# EAGLE board CT_schematic (EAGLE 7.6.0)

Size 100 x 80 mm. Coordinates in mm from the lower left corner, seen from the top.
Outline: 0,0 100,0 100,80 0,80 0,0
Copper layers (1*16): Top 0.035mm / dielectric 1.5mm / Bottom 0.035mm
Design rules "default": minimum track width 10mil, minimum drill 24mil, track to track 8mil, track to pad 8mil, pad to pad 8mil, via to via 8mil, smd to smd 8mil, copper to edge 40mil, drill to drill 8mil, minimum pad ring 10mil, minimum via ring 8mil, stop-mask expansion 4mil, vias tented up to drill 0mil, thermal gap 10mil

## Footprints (pad centres in the part's own frame; a part is rotated, then mirrored left to right if it is on the bottom)
C0603 = smd 0.8 x 0.8: 1 -0.762,0; 2 0.762,0
C0402 = smd 0.5 x 0.5: 1 -0.508,0; 2 0.508,0
C0805 = smd 1.2 x 1.3: 1 -1.016,0; 2 1.016,0
EXV-9B = smd 2.718 x 1.778: 1 -2.108,0; 2 2.108,0
EXV-9H = smd 3.505 x 1.676: 1 -2.857,0; 2 2.857,0
L0603 = smd 0.8 x 0.8: 1 -0.762,0; 2 0.762,0
DR1040 = smd 1.6 x 3.2: 1 -4.458,0; 2 4.458,0
PJ-037B_PACKAGE = drill 3.7 square: 1 12,0 | drill 3.2 square: 2 6,0
R0603 = smd 0.8 x 0.8: 1 -0.762,0; 2 0.762,0
LQFP100 = smd 0.3 x 1.2: 1 -6,-7.75; 2 -5.5,-7.75; 3 -5,-7.75; 4 -4.5,-7.75; 5 -4,-7.75; 6 -3.5,-7.75; 7 -3,-7.75; 8 -2.5,-7.75; 9 -2,-7.75; 10 -1.5,-7.75; 11 -1,-7.75; 12 -0.5,-7.75; 13 0,-7.75; 14 0.5,-7.75; 15 1,-7.75; 16 1.5,-7.75; 17 2,-7.75; 18 2.5,-7.75; 19 3,-7.75; 20 3.5,-7.75; 21 4,-7.75; 22 4.5,-7.75; 23 5,-7.75; 24 5.5,-7.75; 25 6,-7.75; 51 6,7.75; 52 5.5,7.75; 53 5,7.75; 54 4.5,7.75; 55 4,7.75; 56 3.5,7.75; 57 3,7.75; 58 2.5,7.75; 59 2,7.75; 60 1.5,7.75; 61 1,7.75; 62 0.5,7.75; 63 0,7.75; 64 -0.5,7.75; 65 -1,7.75; 66 -1.5,7.75; 67 -2,7.75; 68 -2.5,7.75; 69 -3,7.75; 70 -3.5,7.75; 71 -4,7.75; 72 -4.5,7.75; 73 -5,7.75; 74 -5.5,7.75; 75 -6,7.75 | smd 1.2 x 0.3: 26 7.75,-6; 27 7.75,-5.5; 28 7.75,-5; 29 7.75,-4.5; 30 7.75,-4; 31 7.75,-3.5; 32 7.75,-3; 33 7.75,-2.5; 34 7.75,-2; 35 7.75,-1.5; 36 7.75,-1; 37 7.75,-0.5; 38 7.75,0; 39 7.75,0.5; 40 7.75,1; 41 7.75,1.5; 42 7.75,2; 43 7.75,2.5; 44 7.75,3; 45 7.75,3.5; 46 7.75,4; 47 7.75,4.5; 48 7.75,5; 49 7.75,5.5; 50 7.75,6; 76 -7.75,6; 77 -7.75,5.5; 78 -7.75,5; 79 -7.75,4.5; 80 -7.75,4; 81 -7.75,3.5; 82 -7.75,3; 83 -7.75,2.5; 84 -7.75,2; 85 -7.75,1.5; 86 -7.75,1; 87 -7.75,0.5; 88 -7.75,0; 89 -7.75,-0.5; 90 -7.75,-1; 91 -7.75,-1.5; 92 -7.75,-2; 93 -7.75,-2.5; 94 -7.75,-3; 95 -7.75,-3.5; 96 -7.75,-4; 97 -7.75,-4.5; 98 -7.75,-5; 99 -7.75,-5.5; 100 -7.75,-6
TQFP64_10X10MC = smd 1.473 x 0.279: 1 -5.613,3.75; 2 -5.613,3.25; 3 -5.613,2.75; 4 -5.613,2.25; 5 -5.613,1.75; 6 -5.613,1.25; 7 -5.613,0.75; 8 -5.613,0.25; 9 -5.613,-0.25; 10 -5.613,-0.75; 11 -5.613,-1.25; 12 -5.613,-1.75; 13 -5.613,-2.25; 14 -5.613,-2.75; 15 -5.613,-3.25; 16 -5.613,-3.75; 33 5.613,-3.75; 34 5.613,-3.25; 35 5.613,-2.75; 36 5.613,-2.25; 37 5.613,-1.75; 38 5.613,-1.25; 39 5.613,-0.75; 40 5.613,-0.25; 41 5.613,0.25; 42 5.613,0.75; 43 5.613,1.25; 44 5.613,1.75; 45 5.613,2.25; 46 5.613,2.75; 47 5.613,3.25; 48 5.613,3.75 | smd 0.279 x 1.473: 17 -3.75,-5.613; 18 -3.25,-5.613; 19 -2.75,-5.613; 20 -2.25,-5.613; 21 -1.75,-5.613; 22 -1.25,-5.613; 23 -0.75,-5.613; 24 -0.25,-5.613; 25 0.25,-5.613; 26 0.75,-5.613; 27 1.25,-5.613; 28 1.75,-5.613; 29 2.25,-5.613; 30 2.75,-5.613; 31 3.25,-5.613; 32 3.75,-5.613; 49 3.75,5.613; 50 3.25,5.613; 51 2.75,5.613; 52 2.25,5.613; 53 1.75,5.613; 54 1.25,5.613; 55 0.75,5.613; 56 0.25,5.613; 57 -0.25,5.613; 58 -0.75,5.613; 59 -1.25,5.613; 60 -1.75,5.613; 61 -2.25,5.613; 62 -2.75,5.613; 63 -3.25,5.613; 64 -3.75,5.613
7498011122R = smd 0.71 x 2.29: 1 -3.545,-3.18; 2 -2.525,-3.18; 3 -1.505,-3.18; 4 -0.485,-3.18; 5 0.535,-3.18; 6 1.555,-3.18; 8 3.595,-3.18; 9 5.635,-3.18; 10 6.655,-3.18; 11 -6.605,-3.18; 12 -5.585,-3.18 | smd 1.4 x 2.54: 13 -8.51,10.2; 14 8.51,10.2 | hole 1.4: -3.5,0; 3.5,0
AT24C02D = smd 1.6 x 0.6: 1 -2.475,1.905 | smd 1.55 x 0.6: 2 -2.475,0.635; 3 -2.475,-0.635; 4 -2.475,-1.905; 5 2.475,-1.905; 6 2.475,-0.635; 7 2.475,0.635; 8 2.475,1.905
VFBGA-63 = smd 0.4 x 0.4: A1 -3.6,4.4; A2 -2.8,4.4; A9 2.8,4.4; A10 3.6,4.4; B1 -3.6,3.6; B9 2.8,3.6; B10 3.6,3.6; C3 -2,2.8; C4 -1.2,2.8; C5 -0.4,2.8; C6 0.4,2.8; C7 1.2,2.8; C8 2,2.8; D3 -2,2; D4 -1.2,2; D5 -0.4,2; D6 0.4,2; D7 1.2,2; D8 2,2; E3 -2,1.2; E4 -1.2,1.2; E5 -0.4,1.2; E6 0.4,1.2; E7 1.2,1.2; E8 2,1.2; F3 -2,0.4; F4 -1.2,0.4; F5 -0.4,0.4; F6 0.4,0.4; F7 1.2,0.4; F8 2,0.4; G3 -2,-0.4; G4 -1.2,-0.4; G5 -0.4,-0.4; G6 0.4,-0.4; G7 1.2,-0.4; G8 2,-0.4; H3 -2,-1.2; H4 -1.2,-1.2; H5 -0.4,-1.2; H6 0.4,-1.2; H7 1.2,-1.2; H8 2,-1.2; J3 -2,-2; J4 -1.2,-2; J5 -0.4,-2; J6 0.4,-2; J7 1.2,-2; J8 2,-2; K3 -2,-2.8; K4 -1.2,-2.8; K5 -0.4,-2.8; K6 0.4,-2.8; K7 1.2,-2.8; K8 2,-2.8; L1 -3.6,-3.6; L2 -2.8,-3.6; L9 2.8,-3.6; L10 3.6,-3.6; M1 -3.6,-4.4; M2 -2.8,-4.4; M9 2.8,-4.4; M10 3.6,-4.4
ABS07-32.768KHZ-7-T = smd 1.1 x 2.4: 1 -2.5,0; 2 0,0
ABLS-25.000MHZ-B2F-T = smd 5.6 x 2.8: 1 -3.81,0; 2 5.69,0
LP2954 = smd 1.6 x 0.6: 1 -2.475,1.905 | smd 1.55 x 0.6: 2 -2.475,0.635; 3 -2.475,-0.635; 4 -2.475,-1.905; 5 2.475,-1.905; 6 2.475,-0.635; 7 2.475,0.635; 8 2.475,1.905
TSOT-23-5 = smd 1.3 x 0.62: 1 -1.31,0.95; 2 -1.31,0; 3 -1.31,-0.95; 4 1.31,-0.95; 5 1.31,0.95
SON-6 = smd 0.55 x 0.3: 1 -0.355,0.5 | smd 0.52 x 0.3: 2 -0.37,0; 3 -0.37,-0.5; 4 0.37,-0.5; 5 0.37,0; 6 0.37,0.5
SW_4-1437565-2 = smd 1.4 x 2.1: 1 -2.23,4.55; 2 -2.23,-4.55; 3 2.23,4.55; 4 2.23,-4.55
LGM67K-G1J2-24-Z = smd 0.8 x 1.4: A -2,0; C 0,0
NC7SZ125M5X = smd 1.3 x 0.7: 1 -1.3,0.95; 2 -1.3,0; 3 -1.3,-0.95; 4 1.3,-0.95; 5 1.3,0.95
DUMMY_PACKAGE_218 = drill 0.3: 1 0,-1; 2 1.5,-1; 3 3,-1

## Placement (x,y rotation side)
C1  1e-06  [C0603]  -62.23,80.01 0 top  (outside the outline)
C2  1e-07  [C0603]  -66.04,80.01 0 top  (outside the outline)
C3  1e-07  [C0603]  -69.85,80.01 0 top  (outside the outline)
C4  1e-07  [C0603]  -73.66,80.01 0 top  (outside the outline)
C5  1e-07  [C0603]  -77.47,80.01 0 top  (outside the outline)
C6  1e-07  [C0603]  -15.24,85.09 0 top  (outside the outline)
C7  1e-07  [C0603]  -19.05,85.09 0 top  (outside the outline)
C8  4.7e-06  [C0603]  -39.37,80.01 0 top  (outside the outline)
C9  2.2e-06  [C0603]  -43.18,80.01 0 top  (outside the outline)
C10  2.2e-06  [C0603]  -46.99,80.01 0 top  (outside the outline)
C11  1e-07  [C0603]  -22.86,85.09 0 top  (outside the outline)
C12  1e-07  [C0603]  -26.67,85.09 0 top  (outside the outline)
C13  1e-08  [C0603]  -30.48,85.09 0 top  (outside the outline)
C14  1e-06  [C0603]  -34.29,85.09 0 top  (outside the outline)
C15  1e-11  [C0402]  -27.94,90.17 0 top  (outside the outline)
C16  1e-11  [C0402]  -31.75,90.17 0 top  (outside the outline)
C17  1e-11  [C0402]  -35.56,90.17 0 top  (outside the outline)
C18  1e-11  [C0402]  -39.37,90.17 0 top  (outside the outline)
C19  1.8e-08  [C0402]  -24.13,90.17 0 top  (outside the outline)
C20  2.2e-06  [C0603]  -50.8,80.01 0 top  (outside the outline)
C21  1e-07  [C0402]  -43.18,90.17 0 top  (outside the outline)
C22  1e-08  [C0402]  -46.99,90.17 0 top  (outside the outline)
C23  2.2e-06  [C0603]  -54.61,80.01 0 top  (outside the outline)
C24  1e-07  [C0402]  -50.8,90.17 0 top  (outside the outline)
C25  1e-08  [C0402]  -54.61,90.17 0 top  (outside the outline)
C26  1e-07  [C0402]  -58.42,90.17 0 top  (outside the outline)
C27  1e-07  [C0402]  -62.23,90.17 0 top  (outside the outline)
C28  1e-05  [C0805]  -59.69,62.23 0 top  (outside the outline)
C29  1e-07  [C0402]  -66.04,90.17 0 top  (outside the outline)
C30  1e-07  [C0402]  -69.85,90.17 0 top  (outside the outline)
C31  1e-08  [C0402]  -73.66,90.17 0 top  (outside the outline)
C32  1e-07  [C0402]  -77.47,90.17 0 top  (outside the outline)
C33  1e-07  [C0402]  -15.24,95.25 0 top  (outside the outline)
C34  1e-07  [C0402]  -19.05,95.25 0 top  (outside the outline)
C35  1e-07  [C0402]  -22.86,95.25 0 top  (outside the outline)
C36  2.2e-06  [C0603]  -58.42,80.01 0 top  (outside the outline)
C37  1e-06  [EXV-9B]  -30.48,62.23 0 top  (outside the outline)
C38  2.2e-06  [EXV-9B]  -39.37,62.23 0 top  (outside the outline)
C39  1e-05  [C0805]  -64.77,62.23 0 top  (outside the outline)
C40  1e-05  [C0805]  -69.85,62.23 0 top  (outside the outline)
C41  1e-07  [C0402]  -26.67,95.25 0 top  (outside the outline)
C42  0.0001  [EXV-9H]  -52.07,46.99 0 top  (outside the outline)
C43  0.0001  [EXV-9H]  -63.5,46.99 0 top  (outside the outline)
C44  1e-08  [C0402]  -30.48,95.25 0 top  (outside the outline)
C45  1e-08  [C0402]  -34.29,95.25 0 top  (outside the outline)
F1  240.0  [L0603]  -38.1,85.09 0 top  (outside the outline)
F2  510.0  [L0603]  -41.91,85.09 0 top  (outside the outline)
I1  5.2e-06  [DR1040]  -64.77,34.29 0 top  (outside the outline)
J1  PJ-037B  [PJ-037B_PACKAGE]  -27.94,35.56 0 top  (outside the outline)
R2  1000.0  [R0603]  -45.72,85.09 0 top  (outside the outline)
R4  4700.0  [R0603]  -49.53,85.09 0 top  (outside the outline)
R5  4700.0  [R0603]  -53.34,85.09 0 top  (outside the outline)
R6  2200.0  [R0603]  -57.15,85.09 0 top  (outside the outline)
R7  2200.0  [R0603]  -60.96,85.09 0 top  (outside the outline)
R8  2200.0  [R0603]  -64.77,85.09 0 top  (outside the outline)
R9  2200.0  [R0603]  -68.58,85.09 0 top  (outside the outline)
R10  10000.0  [R0603]  -52.07,69.85 0 top  (outside the outline)
R11  0.1  [R0603]  -72.39,85.09 0 top  (outside the outline)
R12  0.1  [R0603]  -76.2,85.09 0 top  (outside the outline)
R13  200.0  [R0603]  -80.01,85.09 0 top  (outside the outline)
R14  200.0  [R0603]  -15.24,90.17 0 top  (outside the outline)
R15  10000.0  [R0603]  -57.15,69.85 0 top  (outside the outline)
R16  10000.0  [R0603]  -62.23,69.85 0 top  (outside the outline)
R17  10000.0  [R0603]  -67.31,69.85 0 top  (outside the outline)
R18  1270.0  [R0603]  -19.05,90.17 0 top  (outside the outline)
R19  10000.0  [R0603]  -72.39,69.85 0 top  (outside the outline)
R20  10000.0  [R0603]  -77.47,69.85 0 top  (outside the outline)
R21  10000.0  [R0603]  -15.24,74.93 0 top  (outside the outline)
R22  10000.0  [R0603]  -20.32,74.93 0 top  (outside the outline)
R23  10000.0  [R0603]  -25.4,74.93 0 top  (outside the outline)
R24  10000.0  [R0603]  -30.48,74.93 0 top  (outside the outline)
R25  10000.0  [R0603]  -35.56,74.93 0 top  (outside the outline)
R26  10000.0  [R0603]  -40.64,74.93 0 top  (outside the outline)
R27  10000.0  [R0603]  -45.72,74.93 0 top  (outside the outline)
R28  10000.0  [R0603]  -50.8,74.93 0 top  (outside the outline)
R29  10000.0  [R0603]  -55.88,74.93 0 top  (outside the outline)
R30  10000.0  [R0603]  -60.96,74.93 0 top  (outside the outline)
R31  10000.0  [R0603]  -66.04,74.93 0 top  (outside the outline)
R32  10000.0  [R0603]  -71.12,74.93 0 top  (outside the outline)
R33  10000.0  [R0603]  -76.2,74.93 0 top  (outside the outline)
R34  10000.0  [R0603]  -15.24,80.01 0 top  (outside the outline)
R35  100000.0  [R0603]  -21.59,69.85 0 top  (outside the outline)
R36  100000.0  [R0603]  -26.67,69.85 0 top  (outside the outline)
R37  47000.0  [R0603]  -20.32,80.01 0 top  (outside the outline)
R38  100000.0  [R0603]  -31.75,69.85 0 top  (outside the outline)
R39  220000.0  [R0603]  -36.83,69.85 0 top  (outside the outline)
R40  1000000.0  [R0603]  -16.51,69.85 0 top  (outside the outline)
R41  10000.0  [R0603]  -25.4,80.01 0 top  (outside the outline)
R42  10000.0  [R0603]  -30.48,80.01 0 top  (outside the outline)
R43  82000.0  [R0603]  -35.56,80.01 0 top  (outside the outline)
R44  300000.0  [R0603]  -41.91,69.85 0 top  (outside the outline)
R45  120000.0  [R0603]  -46.99,69.85 0 top  (outside the outline)
U1  STM32F407VET6  [LQFP100]  -43.18,8.89 0 top  (outside the outline)
U2  BCM5221KPT  [TQFP64_10X10MC]  -59.69,7.62 0 top  (outside the outline)
U3  7498011122R  [7498011122R]  -22.86,7.62 0 top  (outside the outline)
U4  AT24C02D-SSHM-T  [AT24C02D]  -25.4,46.99 0 top  (outside the outline)
U5  mt29f4g08abbdah4  [VFBGA-63]  -34.29,34.29 0 top  (outside the outline)
U6  ABS07-32.768KHZ-7-T  [ABS07-32.768KHZ-7-T]  -69.85,55.88 0 top  (outside the outline)
U7  ABLS-25.000MHZ-B2F-T  [ABLS-25.000MHZ-B2F-T]  -26.67,55.88 0 top  (outside the outline)
U8  ABLS-25.000MHZ-B2F-T  [ABLS-25.000MHZ-B2F-T]  -46.99,55.88 0 top  (outside the outline)
U9  LP2954AIMX/NOPB  [LP2954]  -41.91,46.99 0 top  (outside the outline)
U10  ltc3406es5  [TSOT-23-5]  -74.93,62.23 0 top  (outside the outline)
U11  TPS3895ADRYR  [SON-6]  -43.18,93.98 0 top  (outside the outline)
U12  4-1437565-2  [SW_4-1437565-2]  -54.61,34.29 0 top  (outside the outline)
U13  Q65110A2395  [LGM67K-G1J2-24-Z]  -17.78,63.5 0 top  (outside the outline)
U14  nc7sz125m5x  [NC7SZ125M5X]  -46.99,62.23 0 top  (outside the outline)
U15  nc7sz125m5x  [NC7SZ125M5X]  -53.34,62.23 0 top  (outside the outline)
U16  Dummy  [DUMMY_PACKAGE_218]  -40.64,95.25 0 top  (outside the outline)

## Library data of the parts
C1-C45 F1 F2 I1 J1 R2 R4-R45 U1-U16 = circuit_tree

## Nets
CLK_CRYSTAL_U1_8: C15.1 U1.8 U6.1
CLK_CRYSTAL_U1_9: C16.1 U1.9 U6.2
CLK_CRYSTAL_U1_12: C17.1 U1.12 U7.1
CLK_CRYSTAL_U1_13: C18.1 U1.13 U7.2
CLK_CRYSTAL_U2_5: U2.5 U8.2
CLK_CRYSTAL_U2_6: U2.6 U8.1
GND: C1.2 C2.2 C3.2 C4.2 C5.2 C6.2 C7.2 C8.2 C9.2 C10.2 C11.2 C12.2 C13.2 C14.2 C15.2 C16.2 C17.2 C18.2 C19.2 C20.2 C21.2 C22.2 C23.2 C24.2 C25.2 C26.2 C27.2 C28.2 C29.2 C30.2 C31.2 C32.2 C33.2 C34.2 C35.2 C36.2 C37.2 C38.2 C39.2 C40.1 C40.2 C41.2 C42.2 C43.2 C44.2 C45.2 J1.2 R2.2 R10.2 R11.2 R12.2 R15.2 R17.2 R18.2 R21.2 R22.2 R23.2 R24.2 R26.2 R28.2 R29.2 R38.2 R39.2 R43.2 R45.2 U1.10 U1.20 U1.27 U1.74 U1.99 U2.7 U2.24 U2.29 U2.32 U2.40 U2.45 U2.54 U2.63 U3.10 U3.12 U4.4 U5.C5 U5.F7 U5.K3 U5.K8 U9.4 U10.2 U11.2 U13.C U14.1 U14.3 U15.1 U15.3 U16.1
NET_U1_14: R5.1 U1.14 U15.4
NET_U1_16: R8.1
NET_U1_22: C11.1 C12.1 C13.1 C14.1 F1.1 U1.21 U1.22
NET_U1_25: R9.1
NET_U1_49: C9.1 U1.49
NET_U1_73: C10.1 U1.73
NET_U1_92: R6.1 U1.92 U4.6
NET_U1_93: R7.1 U1.93 U4.5
NET_U1_94: R10.1 U1.94
NET_U1_97: U13.A
NET_U1_98: U12.3 U12.4
NET_U2_2: C23.1 C24.1 C25.1 U2.2 U2.55
NET_U2_9: R4.1 U2.9 U14.4
NET_U2_10: R19.1 U2.10
NET_U2_11: R20.1 U2.11
NET_U2_12: R21.1 U2.12
NET_U2_13: R22.1 U2.13
NET_U2_14: R23.1 U2.14
NET_U2_16: R17.1 U2.16
NET_U2_18: R25.1 U2.18
NET_U2_20: U2.20
NET_U2_23: R18.1 U2.23
NET_U2_27: C20.1 C21.1 C22.1 U2.22 U2.27 U2.28
NET_U2_37: R24.1 U2.37
NET_U2_38: R15.1 U2.38
NET_U2_39: R16.1 U2.39
NET_U3_1: U2.31 U3.1
NET_U3_2: F2.2 U3.2
NET_U3_3: U2.30 U3.3
NET_U3_4: U2.26 U3.4
NET_U3_5: C19.1 F2.1 U3.2 U3.5
NET_U3_6: U2.25 U3.6
NET_U3_8: R12.1 U3.8
NET_U3_9: R13.1 U3.9
NET_U3_11: R14.1 U3.11
NET_U3_12: R13.2 U3.12
NET_U3_13: R11.1 U3.13 U3.14
NET_U3_35: R14.2
NET_U4_1: R27.1 U4.1
NET_U4_2: R28.1 U4.2
NET_U4_3: R29.1 U4.3
NET_U4_7: R26.1 U4.7
NET_U5_C3: R34.1 U5.C3
NET_U9_3: R36.1 U9.3
NET_U9_5: R35.1 U9.5
NET_U9_7: R37.2 R38.1 U9.7
NET_U10_1: U10.1
NET_U10_3: I1.1 U10.3
NET_U10_5: R39.1 R40.1 U10.5
NET_U10_ATNET_3: I1.2 R40.2
NET_U11_1: R42.1 R43.1 U11.1
NET_U11_3: R44.2 R45.1 U11.3
NET_U11_4: R41.1 U11.4 U14.2 U15.2
NET_U12_1: R2.1 U12.1 U12.2
PROC_FSMC_D0: U1.61 U5.H4
PROC_FSMC_D1: U1.62 U5.J4
PROC_FSMC_D2: U1.81 U5.K4
PROC_FSMC_D3: U1.82 U5.K5
PROC_FSMC_D4: U1.38 U5.K6
PROC_FSMC_D5: U1.39 U5.J7
PROC_FSMC_D6: U1.40 U5.K7
PROC_FSMC_D7: U1.41 U5.J8
PROC_FSMC_NCE2: R31.1 U1.88 U5.C6
PROC_FSMC_NOE: R33.1 U1.85 U5.D4
PROC_FSMC_NWAIT: R30.1 U1.87 U5.C8
PROC_FSMC_NWE: R32.1 U1.86 U5.C7
PROC_TIM1_CH2: U1.42 U16.2
PROC_TIM1_CH4: U1.45 U16.3
VCC_S1_5V2: C37.1 C39.1 C42.1 C43.1 J1.1 R36.2 U9.8 U10.4
VCC_TIER1_1V8: C1.1 C2.1 C3.1 C4.1 C5.1 C6.1 C7.1 C8.1 C31.1 C32.1 C33.1 C34.1 C35.1 C36.1 C38.1 C41.1 C44.1 C45.1 F1.2 R5.2 R6.2 R7.2 R8.2 R9.2 R27.2 R30.2 R31.2 R32.2 R33.2 R34.2 R35.2 R37.1 R41.2 R42.2 R44.1 U1.6 U1.11 U1.19 U1.28 U1.50 U1.75 U1.100 U4.8 U5.D3 U5.G4 U5.H8 U5.J6 U9.1 U11.6 U14.5 U15.5
VCC_TIER1_3V3: C26.1 C27.1 C28.1 C29.1 C30.1 C40.2 I1.2 R4.2 R16.2 R19.2 R20.2 R25.2 R40.2 U2.1 U2.3 U2.46

## Tracks (layer width: path | path; a pad name or v marks a point on that pad's centre or on a via)
CLK_CRYSTAL_U1_8  (2 unrouted)
CLK_CRYSTAL_U1_9  (2 unrouted)
CLK_CRYSTAL_U1_12  (2 unrouted)
CLK_CRYSTAL_U1_13  (2 unrouted)
CLK_CRYSTAL_U2_5  (1 unrouted)
CLK_CRYSTAL_U2_6  (1 unrouted)
GND  (93 unrouted)
NET_U1_14  (2 unrouted)
NET_U1_22  (6 unrouted)
NET_U1_49  (1 unrouted)
NET_U1_73  (1 unrouted)
NET_U1_92  (2 unrouted)
NET_U1_93  (2 unrouted)
NET_U1_94  (1 unrouted)
NET_U1_98  (1 unrouted)
NET_U2_2  (4 unrouted)
NET_U2_9  (2 unrouted)
NET_U2_10  (1 unrouted)
NET_U2_11  (1 unrouted)
NET_U2_12  (1 unrouted)
NET_U2_13  (1 unrouted)
NET_U2_14  (1 unrouted)
NET_U2_16  (1 unrouted)
NET_U2_18  (1 unrouted)
NET_U2_23  (1 unrouted)
NET_U2_27  (5 unrouted)
NET_U2_37  (1 unrouted)
NET_U2_38  (1 unrouted)
NET_U2_39  (1 unrouted)
NET_U3_1  (1 unrouted)
NET_U3_2  (1 unrouted)
NET_U3_3  (1 unrouted)
NET_U3_4  (1 unrouted)
NET_U3_5  (3 unrouted)
NET_U3_6  (1 unrouted)
NET_U3_8  (1 unrouted)
NET_U3_9  (1 unrouted)
NET_U3_11  (1 unrouted)
NET_U3_12  (1 unrouted)
NET_U3_13  (2 unrouted)
NET_U4_1  (1 unrouted)
NET_U4_2  (1 unrouted)
NET_U4_3  (1 unrouted)
NET_U4_7  (1 unrouted)
NET_U5_C3  (1 unrouted)
NET_U9_3  (1 unrouted)
NET_U9_5  (1 unrouted)
NET_U9_7  (2 unrouted)
NET_U10_3  (1 unrouted)
NET_U10_5  (2 unrouted)
NET_U10_ATNET_3  (1 unrouted)
NET_U11_1  (2 unrouted)
NET_U11_3  (2 unrouted)
NET_U11_4  (3 unrouted)
NET_U12_1  (2 unrouted)
PROC_FSMC_D0  (1 unrouted)
PROC_FSMC_D1  (1 unrouted)
PROC_FSMC_D2  (1 unrouted)
PROC_FSMC_D3  (1 unrouted)
PROC_FSMC_D4  (1 unrouted)
PROC_FSMC_D5  (1 unrouted)
PROC_FSMC_D6  (1 unrouted)
PROC_FSMC_D7  (1 unrouted)
PROC_FSMC_NCE2  (2 unrouted)
PROC_FSMC_NOE  (2 unrouted)
PROC_FSMC_NWAIT  (2 unrouted)
PROC_FSMC_NWE  (2 unrouted)
PROC_TIM1_CH2  (1 unrouted)
PROC_TIM1_CH4  (1 unrouted)
VCC_S1_5V2  (7 unrouted)
VCC_TIER1_1V8  (50 unrouted)
VCC_TIER1_3V3  (15 unrouted)